# Altium PCB PCB2.PcbDoc
Units mm, origin at the board's own origin, x right, y up, seen from the top; angles counter-clockwise.
Board outline 152.4 x 101.6 mm, 2 copper layers (Top Layer, Bottom Layer); 17 components, 9 nets, 34 pads, 0 vias.
Unrouted connection lines stored in the file: 18.
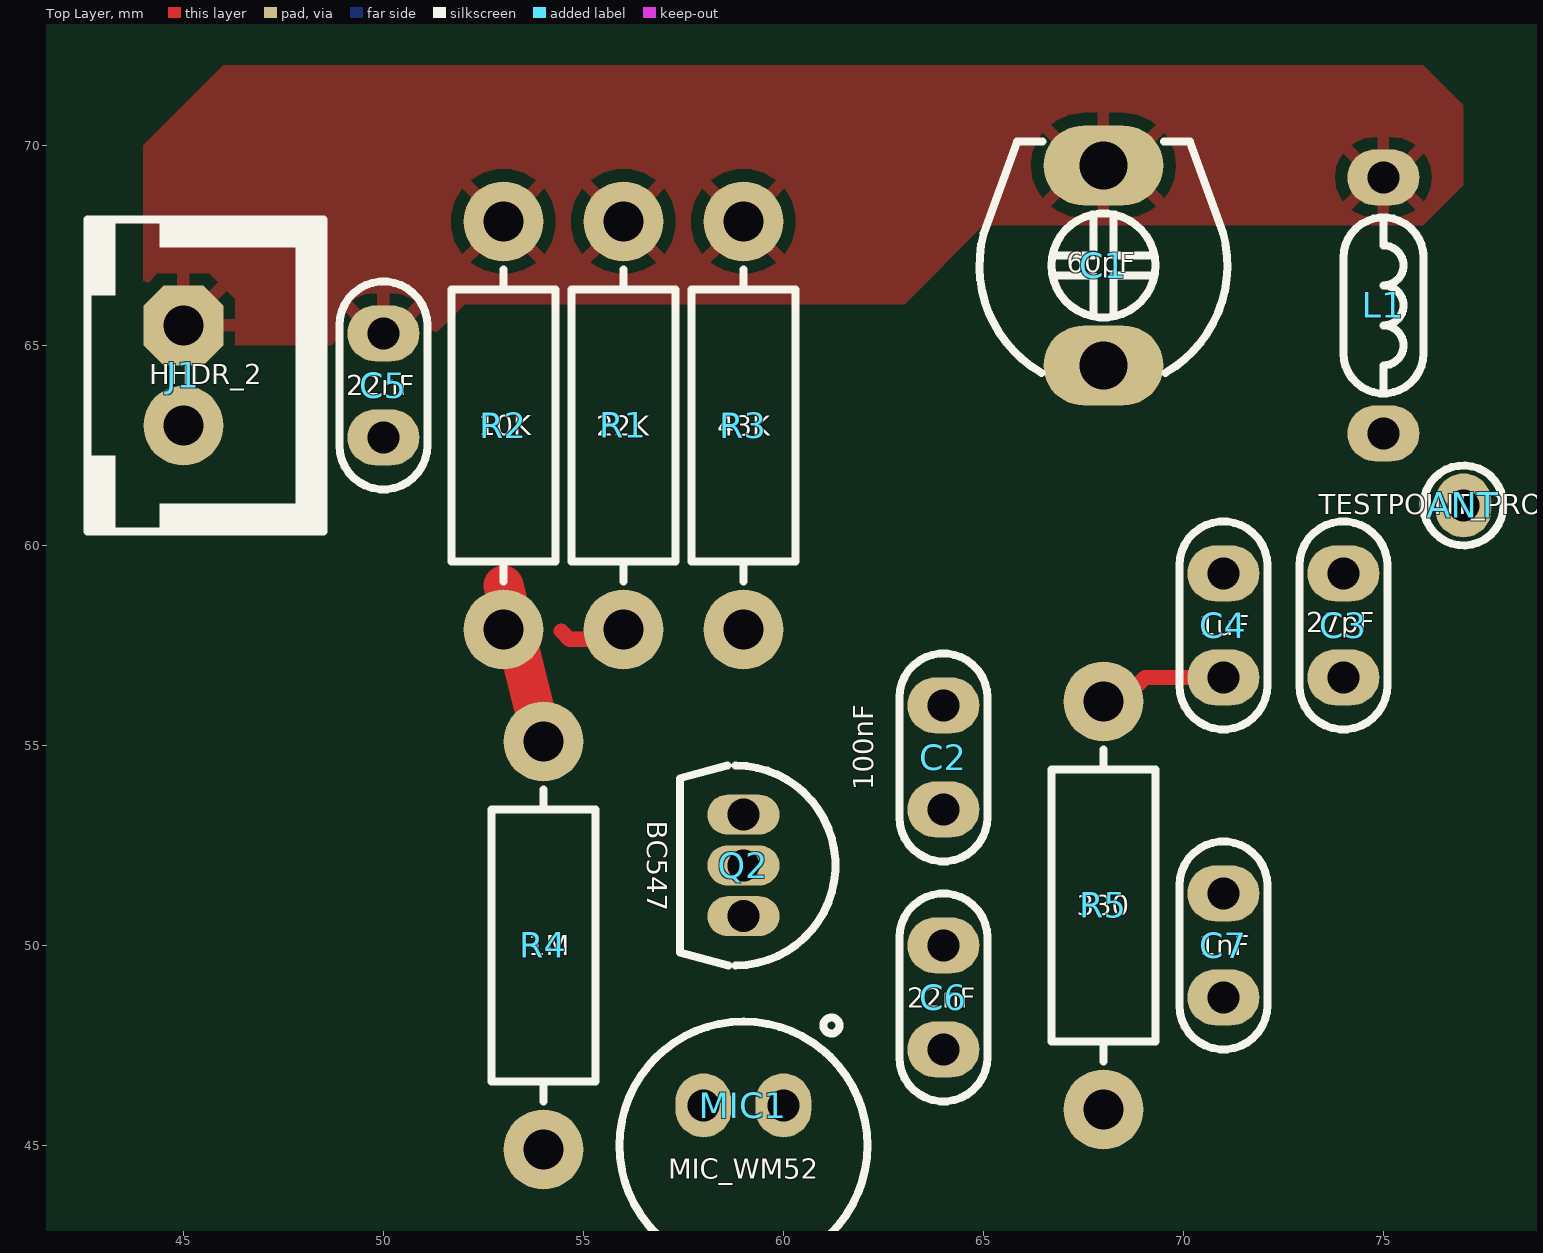
[diagram p0: Top Layer view]
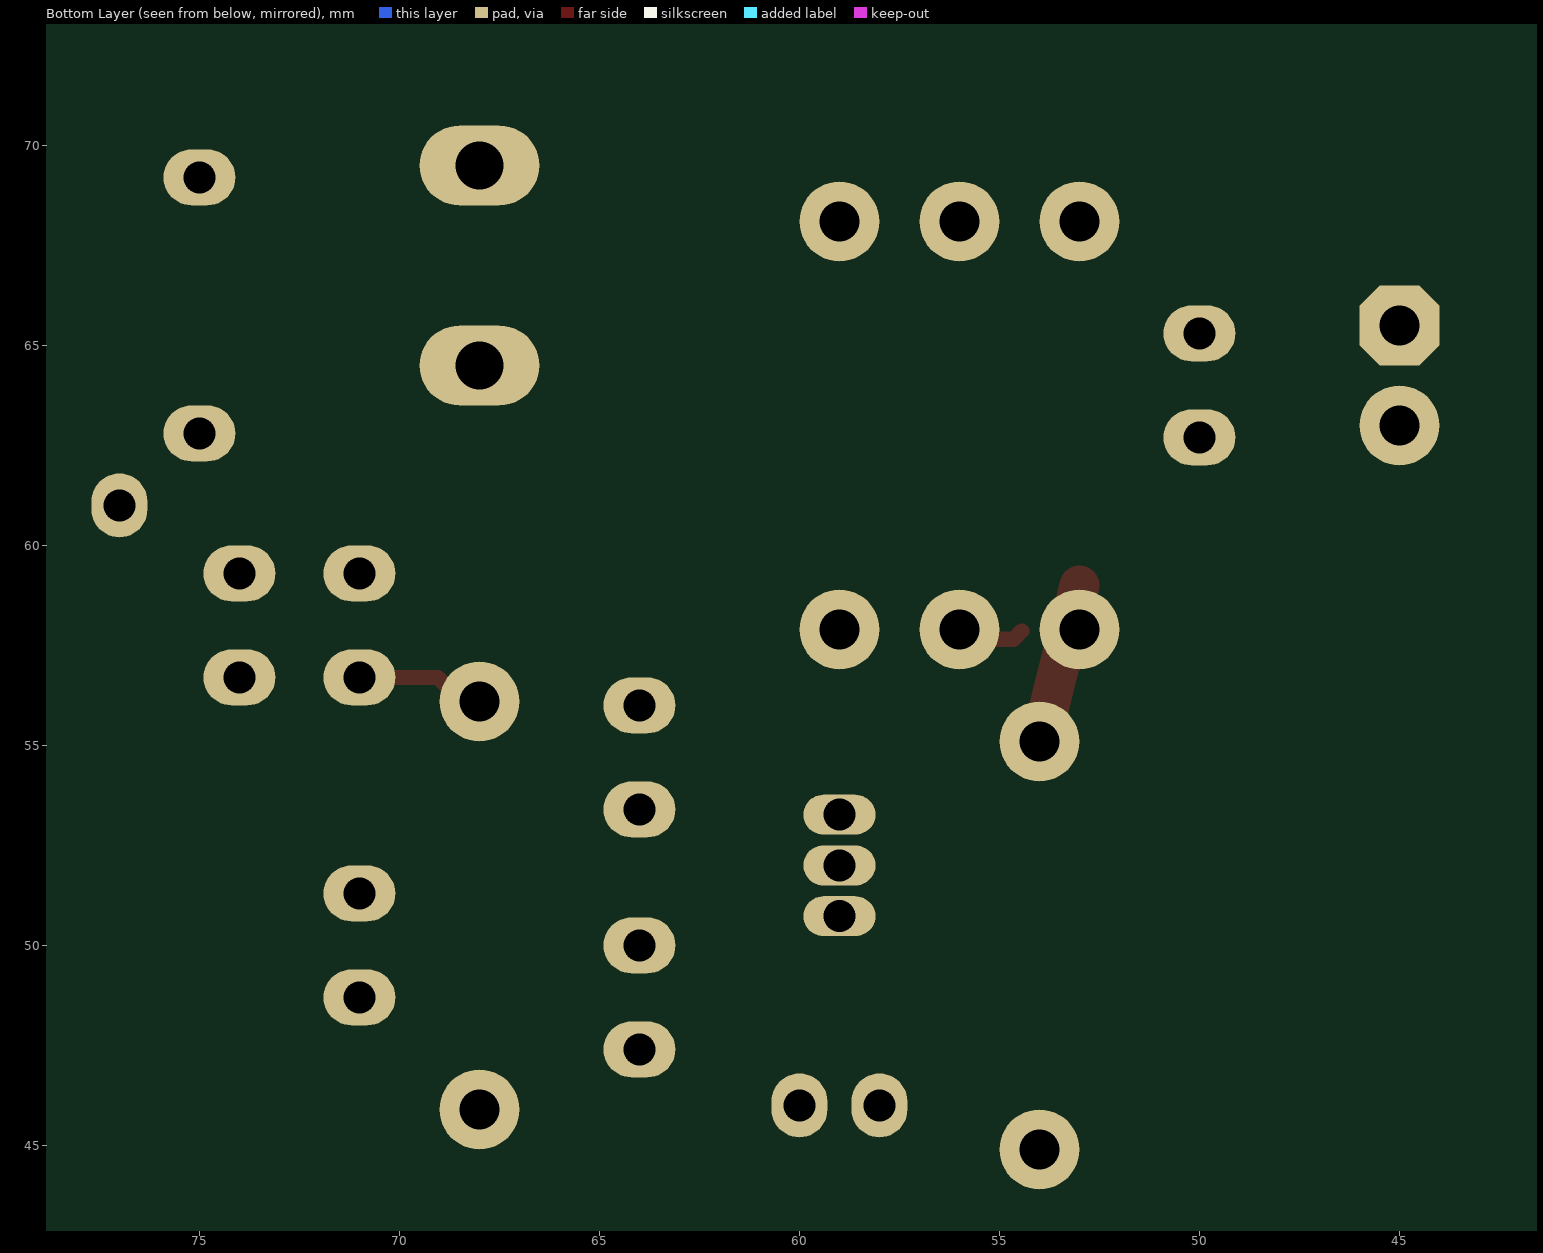
[diagram p1: Bottom Layer view, seen from below]

## Layer stack, top to bottom
Top Solder: solder mask 0.0102, Solder Resist, Dk 3.5
Top Layer: signal copper 0.0356
Dielectric 1: dielectric 0.32, FR-4, Dk 4.8
Bottom Layer: signal copper 0.0356
Bottom Solder: solder mask 0.0102, Solder Resist, Dk 3.5

## Board outline
25.4,25.4 177.8,25.4 177.8,127 25.4,127

## Design rules (kind name [scope] priority, off if disabled: settings)
Clearance [All] p1: gap=0.254 ignorepadtopadclearanceinfootprint=FALSE except(0: Arc-Hole Track-Hole SMDPad-Hole THPad-Hole Via-Hole Fill-Hole Poly-Hole Region-Hole Text-Hole)
PolygonConnect [All] p1: thpad.connectstyle=Relief thpad.reliefconductorwidth=0.33 thpad.reliefentries=4 thpad.polygonreliefangle="90 Angle" thpad.airgapwidth=0.3 thpad.conductorbypadedge=TRUE thpad.mindistance=0.381 thpad.enablemindistance=FALSE smdpad.connectstyle=Relief smdpad.reliefconductorwidth=0.3 smdpad.reliefentries=4 smdpad.polygonreliefangle="90 Angle" smdpad.airgapwidth=0.3 smdpad.conductorbypadedge=TRUE smdpad.mindistance=0.381 smdpad.enablemindistance=FALSE via.connectstyle=Direct via.reliefconductorwidth=0.254 via.reliefentries=4 via.polygonreliefangle="90 Angle" via.airgapwidth=0.254
RoutingVias [All] p1: holewidth=0.711 width=1.27 viastyle="Through Hole" minholewidth=0.711 minwidth=1.27 maxholewidth=0.711 maxwidth=1.27
SolderMaskExpansion [All] p1: expansion=0.102 istentingtop=FALSE
Width [All] p1: maxlimit=1 minlimit=0.3 preferedwidth=0.5 minimp=50.000000 maximp=50.000000 favimp=50.000000
30 further rules are at their usual default settings.

## Components (designator, comment, footprint, x,y, rotation, side; value= is the part's Value field where it differs from the comment)
ANT "TESTPOINT_PROBE" TPTHD_A 77,61 r180 top value=VALUE
C1 "60pF" CTRM_6X6 68,67 r90 top
C2 "100nF" C_CER_D5 64,54.7 r270 top
C3 "27pF" C_CER_D5 74,58 r90 top
C4 "1uF" C_CER_D5 71,58 r90 top
C5 "22nF" C_CER_D5 50,64 r90 top
C6 "22nF" C_CER_D5 64,48.7 r270 top
C7 "1nF" C_CER_D5 71,50 r90 top
J1 "HHDR_2" XH_2 45,64.25 r270 top
L1 "0.1uH" LT_AX025 75,66 r270 top
MIC1 "MIC_WM52" MIC_C6 59,45 r270 top
Q2 "BC547" TO92_3 59,52 r270 top
R1 "22K" R025W_AX04 56,63 r90 top
R2 "10K" R025W_AX04 53,63 r90 top
R3 "43K" R025W_AX04 59,63 r90 top
R4 "1M" R025W_AX04 54,50 r90 top
R5 "330" R025W_AX04 68,51 r90 top

## Footprints (in the part's own frame and the unit in brackets; to place one, negate y for a bottom-side part, rotate by r counter-clockwise, add the part's x,y. Pads: shape width x height; smd on the part's side, far side on the other; paste and mask are expansions set on the pad)
C_CER_D5 [mm] "CAP, CER, D:5mm, pitch: 2.5mm"
  oval 1.4x1.8 hole 0.8: 1(-1.3,0) 2(1.3,0)
  silkscreen extent -2.6,-1.1 2.6,1.1, body extent -2.46,-1 2.46,1, height 5.45
CTRM_6X6 [mm] "CAP, TRIMMER, Murata TZ03"
  oval 2x3 hole 1.2: 1(-2.5,0) 2(2.5,0)
  silkscreen extent -2.68,-3.1 3.1,3.1, body extent -3,-3 3,3, height 4.8
LT_AX025 [mm] "INDUCTOR, Axial, 6.4mm,"
  oval 1.4x1.8 hole 0.8 mask+0.1: 1(-3.2,0) 2(3.2,0)
  silkscreen extent -2.2,-1 2.2,1, body extent -3.43,-0.92 3.43,0.92, height 1.92
MIC_C6 [mm] "MIC, WM-63PR, POM-3535P-3-R"
  oval 1.6x1.4 hole 0.8: 1(-1,1) 2(-1,-1)
  silkscreen extent -3.2,-3.1 3.1,3.1, body extent -3,-3 3,3, height 2.4
R025W_AX04 [mm] "RESISTOR 1/4 WATT, AXIAL0.4"
  round 2 hole 1: 1(-5.1,0) 2(5.1,0)
  silkscreen extent -3.9,-1.3 3.9,1.3, body extent -5.38,-1.28 5.38,1.28, height 2.6
TO92_3 [mm] "TO-92, SOT54"
  oval 1x1.8 hole 0.8 mask+0.1: 1(-1.27,0) 2(0,0) 3(1.27,0)
  silkscreen extent -2.5,-1.59 2.5,2.3, body extent -2.38,-1.45 2.38,2.18, height 4.82
TPTHD_A [mm] "TEST POINT, SMALLEST SIZE"
  oval 1.4x1.6 hole 0.8: 1(0,0)
  silkscreen extent -1,-1 1,1, body extent -0.5,-0.5 0.5,0.5, height 6.5
XH_2 [mm] "PW10-xx-M, JST-BxB-XH-A pitch: 2.5mm"
  oct 2x2 hole 1: 1(-1.25,0)
  round 2 hole 1: 2(1.25,0)
  silkscreen extent -3.9,-2.4 3.9,3.5, body extent -3.75,-2.3 3.75,3.4, height 7

## Part data
ANT: "TEST POINT", MANF=MANF, MANF_P#=MANF_P#
C1: library part CAP_THD_TRIMMER, "CAP, THD, TRIMMER", ASSEMBLY=ASSEMBLY, DESC="CAP, SMD, TRIMMER", MANF=MANF, MANF_P#=MANF_PART#, PARAM=PARAM, PARAM2=PARAM2, PRICE="100= 1$"
C2 C3 C4 C5 C6 C7: library part CAP_THD_CER, "CAP, THD, CER MULTI LAYER,", ASSEMBLY=ASSEMBLY, DESC="CAP, CER MULTI LAYER,", MANF=MANF, MANF_P#=MANF_PART#, PARAM2=50V, PRICE="100= 1$"
J1: library part XH_2, "JST-XH pitch: 2.5mm"
L1: library part IND_THD, "INDUCTOR, THD"
MIC1: library part MIC_WM-52, "MICROPHONE OMNI", MANF_P#=WM52BM, PRICE=PRICE
Q2: library part NPN_BC547_TO92, "BJT, NPN, 45v, 0.1A, THD, TO92", MANF=FAIRCHILD, MANF_P#=BC547, PARAM="0.1A, Hfe110~800", PARAM2="45v, 500mW"
R1 R2 R3 R4 R5: library part RES_THD, "RESISTOR, THD", ASSEMBLY=ASSEMBLY, DESC=DESCRIPTION, DIST#=MOUSER, MANF="KOA SPEER", MANF_P#=RK73H1ETTP4701F, PARAM=0.063W, PARAM2=1%, PRICE="100= 0.5$"

## Nets (pads, with @x,y where several pads share a name; then routed paths per layer and width w, separated by ;. In a path a pad name is that pad's centre, name@x,y a point inside that pad or via, vN(x,y) a via of type N, cw(c..) or ccw(c..) an arc to the next point about the centre after c; other vN are vias at no path point)
ANT: ANT.1 C3.2
GND: C5.1 C7.1 J1.2 MIC1.2 Q2.3 R5.1
NetC1_1: C1.1 C3.1 C4.2 L1.2
NetC2_1: C2.1 C7.2 R3.1
NetC2_2: C2.2 Q2.1 R2.1 R4.2
NetC4_1: C4.1 R5.2 | length 3.2
  Top Layer w0.381: R5.2 68.438,56.1 69.038,56.7 C4.1
NetC6_1: C6.1 Q2.2 R4.1
NetC6_2: C6.2 MIC1.1 R1.1 | length 1.7
  Top Layer w0.381: 54.445,57.859 54.652,57.652 55.752,57.652 R1.1
VCC: C1.2 C5.2 J1.1 L1.1 R1.2 R2.2 R3.2
copper on no net: | length 4.1
  Top Layer w1: 53,59 54,55

## Polygon pours and split planes (outlines as drawn)
VCC on Top Layer "VCC_L01_P000" (solid, remove dead copper, pour order 0): 44,65 51,65 52.031,66.031 63.031,66.031 65,68 76,68 77,69 77,71 76,72 46,72 44,70

## Silkscreen, mask and mechanical layers (free items; w line width, h text height)
Top Overlay:
  drawing of 135 lines, arcs and shapes, not listed